# EAGLE board AD5933 (EAGLE 9.6.2)

Size 100 x 80 mm. Coordinates in mm from the lower left corner, seen from the top.
Outline: 0,0 100,0 100,80 0,80 0,0
Copper layers (1*16): Top 0.035mm / dielectric 1.5mm / Bottom 0.035mm
Design rules "default": minimum track width 6mil, minimum drill 0.35mm, track to track 6mil, track to pad 6mil, pad to pad 6mil, via to via 6mil, smd to smd 6mil, copper to edge 40mil, drill to drill 6mil, minimum pad ring 10mil, minimum via ring 8mil, stop-mask expansion 4mil, vias tented up to drill 0mil, thermal gap 10mil

## Footprints (pad centres in the part's own frame; a part is rotated, then mirrored left to right if it is on the bottom)
0603 = smd 1.1 x 1: 1 -0.85,0; 2 0.85,0
1X04 = drill 1.016 pad 1.88: 1 0,0; 2 2.54,0; 3 5.08,0; 4 7.62,0
CUI_SJ-3523-SMT-TR = smd 2.2 x 2.8: 1 -1.1,-3.7; 3 0.9,3.7 | smd 2.8 x 2.8: 2 8.3,-3.7 | hole 1.7: 0,0; 7,0
ANALOG_DEVICES_AD5933YRSZ_0 = smd 1.8 x 0.45: 1 -3.4,2.275; 2 -3.4,1.625; 3 -3.4,0.975; 4 -3.4,0.325; 5 -3.4,-0.325; 6 -3.4,-0.975; 7 -3.4,-1.625; 8 -3.4,-2.275; 9 3.4,-2.275; 10 3.4,-1.625; 11 3.4,-0.975; 12 3.4,-0.325; 13 3.4,0.325; 14 3.4,0.975; 15 3.4,1.625; 16 3.4,2.275
SOIC127P600X175-8N = smd 1.97 x 0.57: 1 -2.475,1.905; 2 -2.475,0.635; 3 -2.475,-0.635; 4 -2.475,-1.905; 5 2.475,-1.905; 6 2.475,-0.635; 7 2.475,0.635; 8 2.475,1.905
SOIC127P599X175-8N = smd 1.97 x 0.6: 1 -2.47,1.905; 2 -2.47,0.635; 3 -2.47,-0.635; 4 -2.47,-1.905; 5 2.47,-1.905; 6 2.47,-0.635; 7 2.47,0.635; 8 2.47,1.905

## Placement (x,y rotation side)
C1  3.3nF  [0603]  -26.67,43.18 0 top  (outside the outline)
J1  Raspi  [1X04]  -22.86,43.18 0 top  (outside the outline)
J2  SJ-3523-SMT-TR  [CUI_SJ-3523-SMT-TR]  -24.13,7.62 0 top  (outside the outline)
J3  SJ-3523-SMT-TR  [CUI_SJ-3523-SMT-TR]  -24.13,22.86 0 top  (outside the outline)
R1  10k  [0603]  -30.48,43.18 0 top  (outside the outline)
R2  10k  [0603]  -34.29,43.18 0 top  (outside the outline)
R3  10k  [0603]  -38.1,43.18 0 top  (outside the outline)
R4  10k  [0603]  -41.91,43.18 0 top  (outside the outline)
R5  10k  [0603]  -15.24,48.26 0 top  (outside the outline)
R6  10k  [0603]  -19.05,48.26 0 top  (outside the outline)
R7  10k  [0603]  -22.86,48.26 0 top  (outside the outline)
R8  10k  [0603]  -26.67,48.26 0 top  (outside the outline)
R9  1.8k  [0603]  -30.48,48.26 0 top  (outside the outline)
R10  1.8k  [0603]  -34.29,48.26 0 top  (outside the outline)
U1  ANALOG_DEVICES_AD5933YRSZANALOG_DEVICES_AD5933YRSZ_0_0  [ANALOG_DEVICES_AD5933YRSZ_0]  -36.83,34.29 0 top  (outside the outline)
U2  TL072  [SOIC127P600X175-8N]  -34.29,20.32 0 top  (outside the outline)
U3  TL072  [SOIC127P600X175-8N]  -16.51,35.56 0 top  (outside the outline)
U4  INA826AID  [SOIC127P599X175-8N]  -27.94,35.56 0 top  (outside the outline)

## Library data of the parts
C1 = SparkFun-Capacitors; PROD_ID: CAP-09633
J1 = SparkFun-Connectors; PROD_ID: CONN-09696
J2 J3 = SJ-3523-SMT-TR; AVAILABILITY: In Stock; CUI_PURCHASE_URL: https://www.cuidevices.com/product/interconnect/connectors/audio-connectors/jacks/sj-352x-smt-series?utm_source=snapeda.com&utm_medium=referral&utm_campaign=snapedaBOM; DESCRIPTION: 3.5 mm, Stereo, Right Angle, Surface Mount (SMT), 3 Conductors, 0~1 Internal Switches, Audio Jack Connector; MF: CUI Devices; MP: SJ-3523-SMT-TR; PACKAGE: None; PRICE: None; PURCHASE-URL: https://pricing.snapeda.com/search/part/SJ-3523-SMT-TR/?ref=eda
R1-R10 = SparkFun-Resistors; PROD_ID: RES-00824
U1 = Analog Devices - AD5933YRSZ; CIIVA_IDS: 19299999; CODE__JEDEC: MO-150-AC; COMPONENT_LINK_1_DESCRIPTION: Manufacturer URL; COMPONENT_LINK_1_URL: www.analog.com; COMPONENT_LINK_3_DESCRIPTION: Package Specification; COMPONENT_LINK_3_URL: http://www.analog.com/static/imported-files/packages/31572257652246RS_16.pdf; DATASHEET: http://www.analog.com/static/imported-files/data_sheets/AD5933.pdf; DATASHEET_VERSION: Rev. D; FOOTPRINT_VARIANT_NAME_0: Level C; FOOTPRINT_VARIANT_NAME_1: Level B; FOOTPRINT_VARIANT_NAME_2: Level A; IMPORTED: yes; IMPORTED_FROM: vault; IMPORT_TS: 1521848033; IO_INTERFACE: Serial; I_SUPPLY_TOTAL_MAX: 15mA; MASTER_FCLK: 16.776MHz; MF: Analog Devices; MPN: AD5933YRSZ; PACKAGE: RS-16; PACKAGE_DESCRIPTION: 16-Lead Shrink Small Outline Package [SSOP]; PACKAGE_VERSION: 3/17/2005; PIN_0_0_15_INSIDE_EDGE: clock; PIN_0_0_7_INSIDE_EDGE: clock; PREFIX: U; RELEASE_DATE: 1333437714; RESOLUTION_BITS: 12bit; TUNING_WORD_WIDTH_BITS: 27bit; VAULT_GUID: 12E548FF-7E75-4596-9B3A-06B167E4919E; VAULT_REVISION: 0B288880-7FBC-46A2-8187-17CED40A7223
U2 U3 = TL072; AVAILABILITY: In Stock; DESCRIPTION: Op Amp Dual Low Noise Amplifier ±15V/30V 8-Pin CDIP Tube; MF: Texas Instruments; MP: TL072; PACKAGE: None; PRICE: None; PURCHASE-URL: https://pricing.snapeda.com/search/part/TL072/?ref=eda
U4 = INA826AID; AVAILABILITY: In Stock; DESCRIPTION: Precision, 200-μA Supply Current, 36-V Supply Instrumentation Amplifier; MF: Texas Instruments; MP: INA826AID; PACKAGE: SOIC-8 Texas Instruments; PRICE: None; PURCHASE-URL: https://pricing.snapeda.com/search/part/INA826AID/?ref=eda

## Nets
3.3V: J1.4 R4.2 R6.2 R9.1 R10.1 U1.9 U1.10 U1.11 U4.8
E1: J3.2 R3.1 R5.2 U3.2
E2: J3.1 R3.2 U3.1
E3: J2.2 U4.4
E4: J2.1 U4.1
GND: J1.3 R1.1 R7.1 U1.12 U1.13 U1.14 U4.5
N$1: R2.1 U4.7
N$2: C1.1 U1.6
N$3: C1.2 R1.2 R6.1 U2.3
N$4: R5.1 U2.1 U2.2
N$5: R8.1 U1.4
N$7: R4.1 R7.2 U2.5
RIN: R2.2 R8.2 U1.5
SCL: J1.1 R9.2 U1.16
SDA: J1.2 R10.2 U1.15
V+: U2.8 U3.8
V-: U2.4 U3.4
VREF: U2.6 U2.7 U3.3 U4.6

## Tracks (layer width: path | path; a pad name or v marks a point on that pad's centre or on a via)
3.3V  (8 unrouted)
E1  (3 unrouted)
E2  (2 unrouted)
E3  (1 unrouted)
E4  (1 unrouted)
GND  (6 unrouted)
N$1  (1 unrouted)
N$2  (1 unrouted)
N$3  (3 unrouted)
N$4  (2 unrouted)
N$5  (1 unrouted)
N$7  (2 unrouted)
RIN  (2 unrouted)
SCL  (2 unrouted)
SDA  (2 unrouted)
V+  (1 unrouted)
V-  (1 unrouted)
VREF  (3 unrouted)